# EAGLE board HC-SR04_Middle-Man v14 (EAGLE 9.7.0)
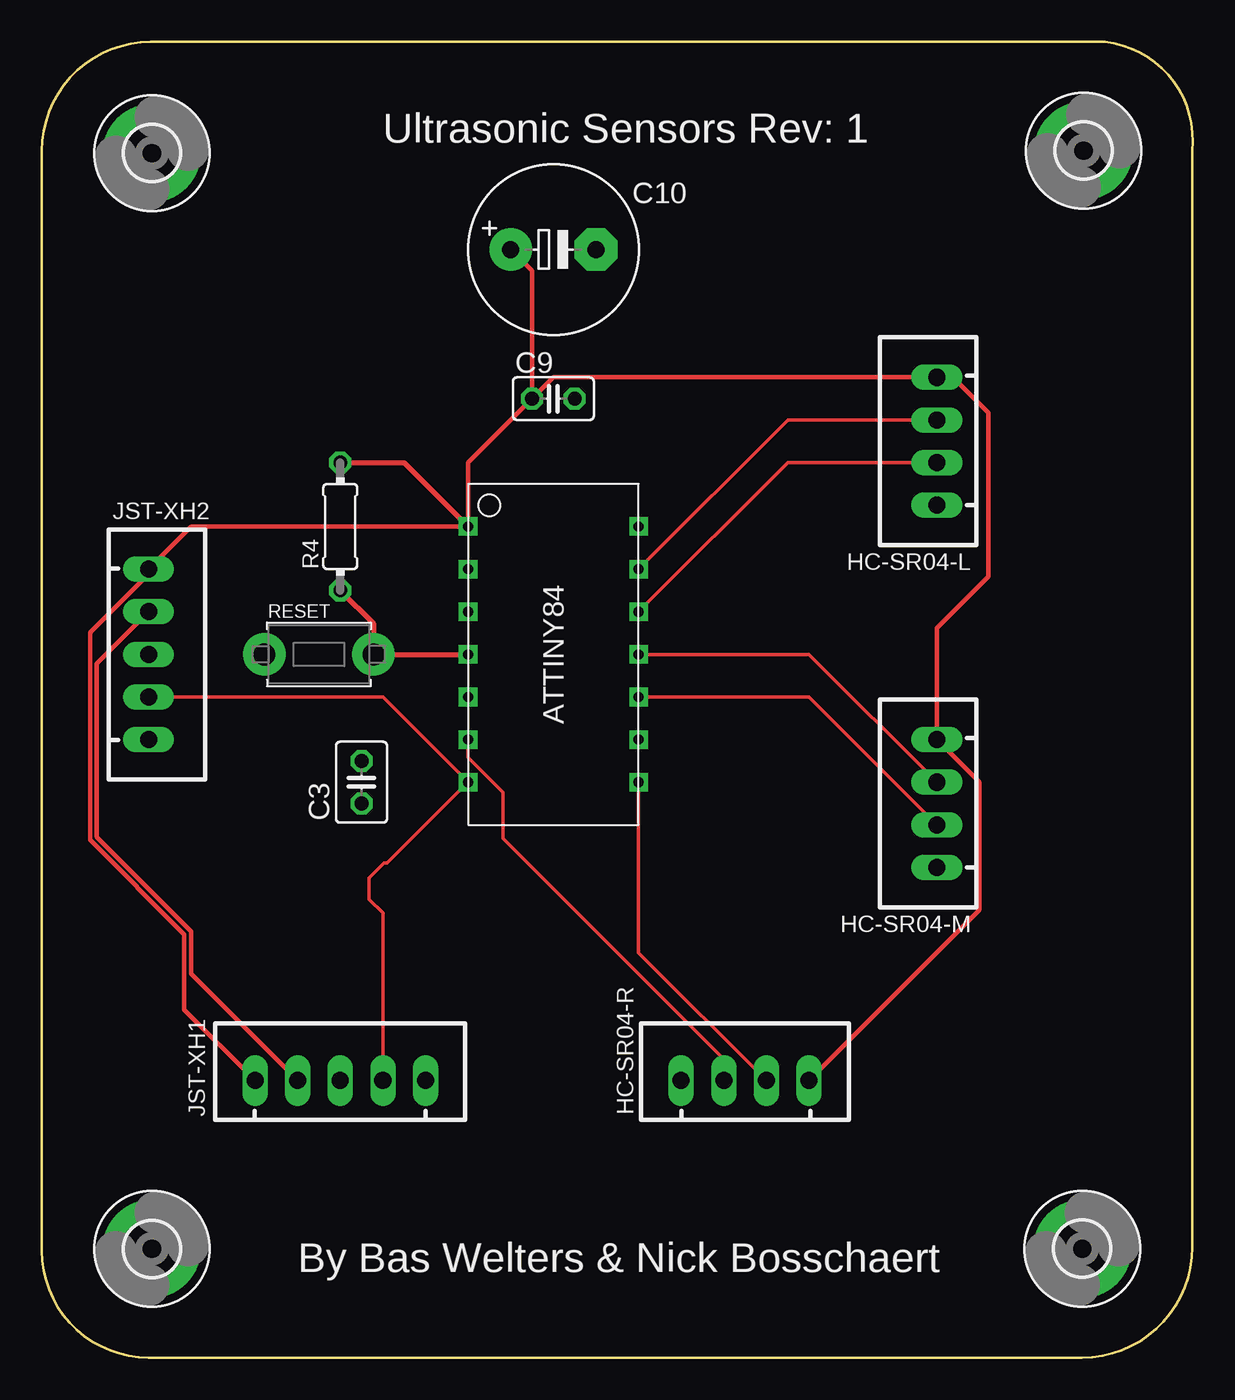
[diagram p0: board, top side]
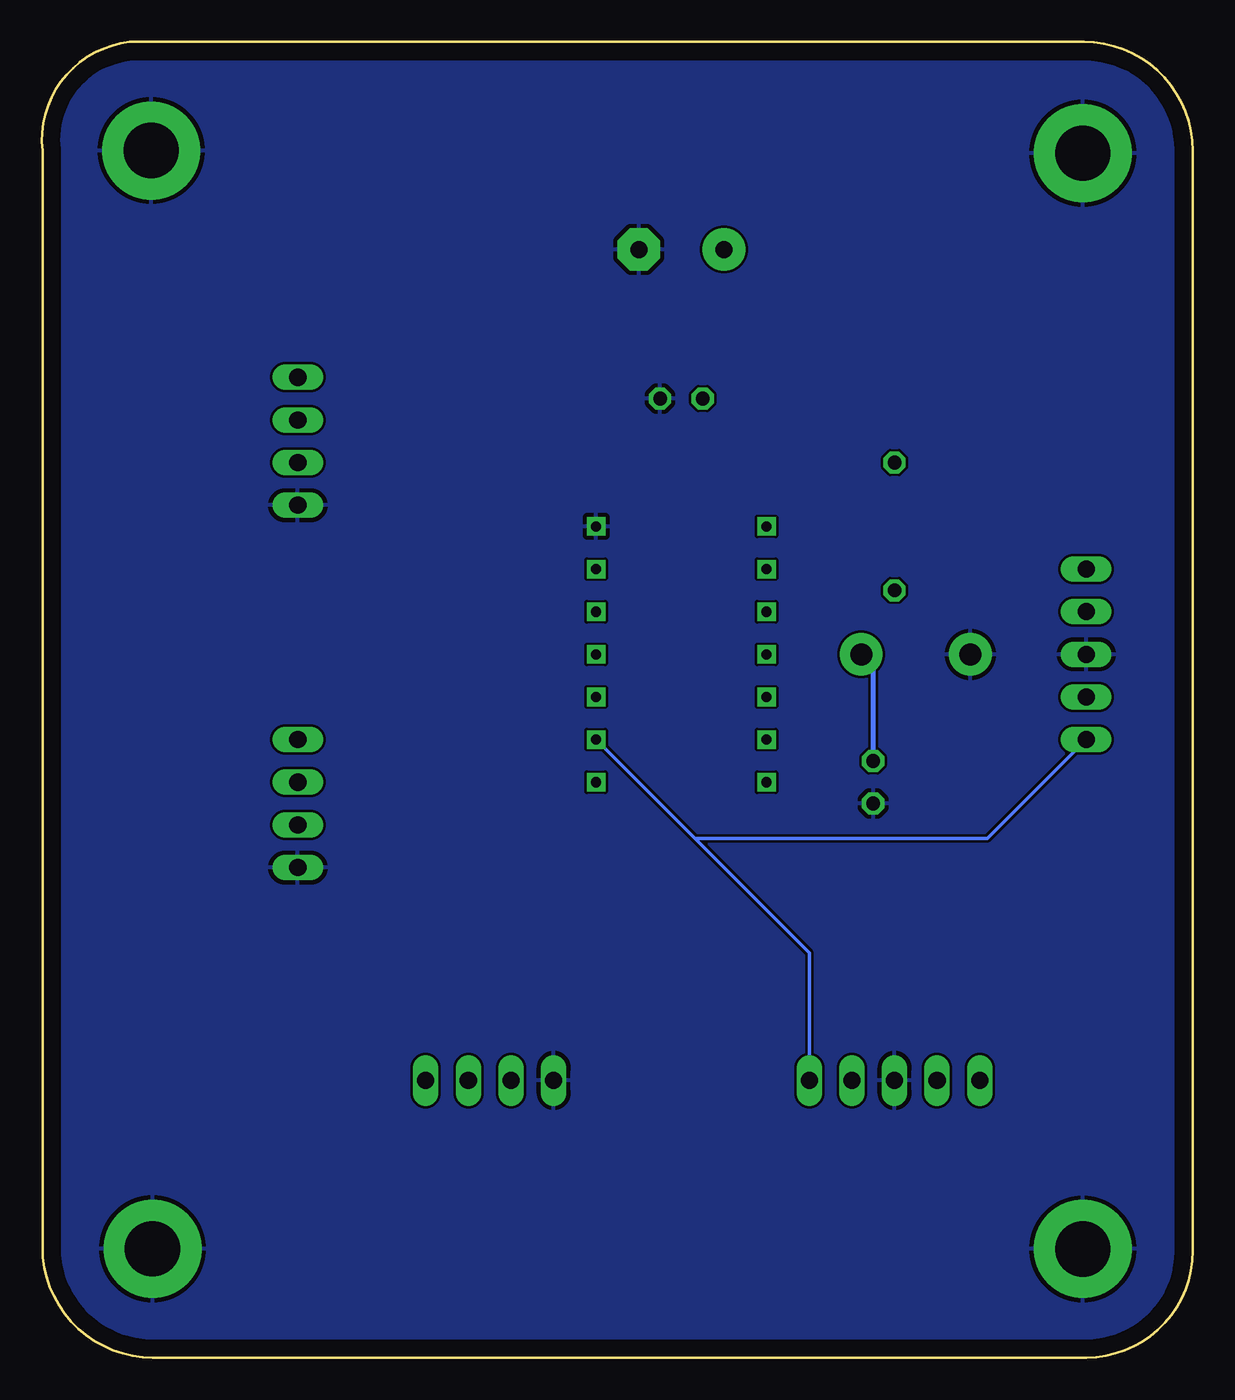
[diagram p1: board, bottom side, seen from below]

Size 68.59 x 78.41 mm. Coordinates in mm from the lower left corner, seen from the top.
Outline: 6.48,78.41 63.35,78.41 arc-90 68.56,71.93 68.56,6.57 arc-90 61.99,0 6.35,0 arc-90 0,6.35 0,71.93 arc-90 6.48,78.41
Copper layers (1*16): Top 0.035mm / dielectric 1.5mm / Bottom 0.035mm
Design rules "default": minimum track width 6mil, minimum drill 0.35mm, track to track 6mil, track to pad 6mil, pad to pad 6mil, via to via 6mil, smd to smd 6mil, copper to edge 40mil, drill to drill 6mil, minimum pad ring 10mil, minimum via ring 8mil, stop-mask expansion 4mil, vias tented up to drill 0mil, thermal gap 10mil

## Footprints (pad centres in the part's own frame; a part is rotated, then mirrored left to right if it is on the bottom)
C025-030X050 = drill 0.813 octagon: 1 -1.27,0; 2 1.27,0
C025-025X050 = drill 0.813 octagon: 1 -1.27,0; 2 1.27,0
E5-10,5 = drill 1.016 pad 2.54: + -2.54,0 | drill 1.016 pad 2.54 octagon: - 2.54,0
3,3-PAD = drill 3.3 pad 5.842: B3,3 0,0
JST-XH-04-PACKAGE-LONG-PAD = drill 1.016 long: 1 -3.81,0; 2 -1.27,0; 3 1.27,0; 4 3.81,0
JST-XH-05-PACKAGE-LONG-PAD = drill 1.016 long: 1 -5.08,0; 2 -2.54,0; 3 0,0; 4 2.54,0; 5 5.08,0
0204/7 = drill 0.813 octagon: 1 -3.81,0; 2 3.81,0
TACT_PANA-EVQ = drill 1.3 pad 2.54: P$1 -3.25,0; P$2 3.25,0
ATTINY84(DIP) = drill 0.6 square: GND 10.16,0; PA0 10.16,-2.54; PA1 10.16,-5.08; PA2 10.16,-7.62; PA3 10.16,-10.16; PA4 10.16,-12.7; PA5 10.16,-15.24; PA6 0,-15.24; PA7 0,-12.7; PB0 0,-2.54; PB1 0,-5.08; PB2 0,-10.16; PB3 0,-7.62; VCC 0,0

## Placement (x,y rotation side)
C3  0.1uF  [C025-030X050]  19.05,34.29 90 top
C9  0.1uF  [C025-025X050]  30.48,57.15 0 top
C10  10uF  [E5-10,5]  30.48,66.04 0 top
H1  MOUNT-PAD-ROUND3.3  [3,3-PAD]  62,6.48 0 top
H2  MOUNT-PAD-ROUND3.3  [3,3-PAD]  6.55,6.48 0 top
H3  MOUNT-PAD-ROUND3.3  [3,3-PAD]  62.08,71.93 0 top
H4  MOUNT-PAD-ROUND3.3  [3,3-PAD]  6.55,71.78 0 top
HC-SR04-L  LEFT_Sonic  [JST-XH-04-PACKAGE-LONG-PAD]  53.34,54.61 90 top
HC-SR04-M  Mid_Sonic  [JST-XH-04-PACKAGE-LONG-PAD]  53.34,33.02 90 top
HC-SR04-R  Right_Sonic  [JST-XH-04-PACKAGE-LONG-PAD]  41.91,16.51 0 top
JST-XH1  I2C-BUS  [JST-XH-05-PACKAGE-LONG-PAD]  17.78,16.51 0 top
JST-XH2  I2C-BUS  [JST-XH-05-PACKAGE-LONG-PAD]  6.35,41.91 270 top
R4  10k  [0204/7]  17.78,49.53 90 top
RESET  [TACT_PANA-EVQ]  16.51,41.91 0 top
U$3  ATTINY84DIP  [ATTINY84(DIP)]  25.4,49.53 0 top

## Library data of the parts
C3 C9 C10 = rcl; SPICEPREFIX: C
H1-H4 = holes
HC-SR04-L HC-SR04-M HC-SR04-R JST-XH1 JST-XH2 = Rembrandt Electronics - JST XH Connectors v1-0
R4 = rcl; SPICEPREFIX: R
RESET = adafruit
U$3 = RobotMower_Eagle_Library

## Nets
3V3: JST-XH1.2 JST-XH2.2
5V: C9.1 C10.+ HC-SR04-L.4 HC-SR04-M.4 HC-SR04-R.4 JST-XH1.1 JST-XH2.1 R4.2 U$3.VCC
GND: C3.1 C9.2 C10.- H1.B3,3 H2.B3,3 H3.B3,3 H4.B3,3 HC-SR04-L.1 HC-SR04-M.1 HC-SR04-R.1 JST-XH1.3 JST-XH2.3 RESET.P$1 U$3.GND
L-ECHO: HC-SR04-L.2 U$3.PA1
L-TRIG: HC-SR04-L.3 U$3.PA0
M-ECHO: HC-SR04-M.2 U$3.PA3
M-TRIG: HC-SR04-M.3 U$3.PA2
R-ECHO: HC-SR04-R.2 U$3.PA7
R-TRIG: HC-SR04-R.3 U$3.PA5
RST: C3.2 R4.1 RESET.P$2 U$3.PB3
SCL: JST-XH1.5 JST-XH2.5 U$3.PA4
SDA: JST-XH1.4 JST-XH2.4 U$3.PA6

## Tracks (layer width: path | path; a pad name or v marks a point on that pad's centre or on a via)
3V3
  Top 0.254: JST-XH2.2 3.28,41.38 3.28,31.01 8.89,25.4 8.89,22.86 JST-XH1.2
5V
  Top 0.254: JST-XH1.1 8.48,20.73 8.48,25.23 2.87,30.84 2.87,43.2 6.35,46.69 JST-XH2.1 8.89,49.53 U$3.VCC 25.4,53.34 C9.1 | C9.1 29.21,64.77 C10.+ | C9.1 30.48,58.42 HC-SR04-L.4 54.3,58.42 56.41,56.31 56.41,46.56 53.34,43.48 HC-SR04-M.4 55.88,34.29 55.88,26.67 HC-SR04-R.4
  Top 0.305: R4.2 21.59,53.34 U$3.VCC
GND
  pour Bottom: 2.57,-1.19 67.28,-1.19 68.5,0.03 68.5,77.39 2.57,77.39 0.08,74.9 0.08,1.3
L-ECHO
  Top 0.203: U$3.PA1 44.45,53.34 HC-SR04-L.2
L-TRIG
  Top 0.203: U$3.PA0 44.45,55.88 HC-SR04-L.3
M-ECHO
  Top 0.203: U$3.PA3 45.72,39.37 HC-SR04-M.2
M-TRIG
  Top 0.203: U$3.PA2 45.72,41.91 HC-SR04-M.3
R-ECHO
  Top 0.203: U$3.PA7 25.4,35.76 27.48,33.68 27.48,30.94 40.64,17.78 HC-SR04-R.2
R-TRIG
  Top 0.203: HC-SR04-R.3 35.56,24.13 U$3.PA5
RST
  Top 0.305: R4.1 19.76,43.74 RESET.P$2 U$3.PB3
  Bottom 0.305: C3.2 19.05,41.2 RESET.P$2
SCL
  Bottom 0.203: JST-XH2.5 12.24,30.94 29.67,30.94 U$3.PA4 22.86,24.13 JST-XH1.5
SDA
  Top 0.203: JST-XH2.4 20.32,39.37 U$3.PA6 20.57,29.46 20.4,29.46 19.51,28.57 19.51,27.31 20.32,26.49 JST-XH1.4

## Text on the board
tPlace: Ultrasonic Sensors Rev: 1 | By Bas Welters & Nick Bosschaert